# EAGLE board concept (EAGLE 6.3)
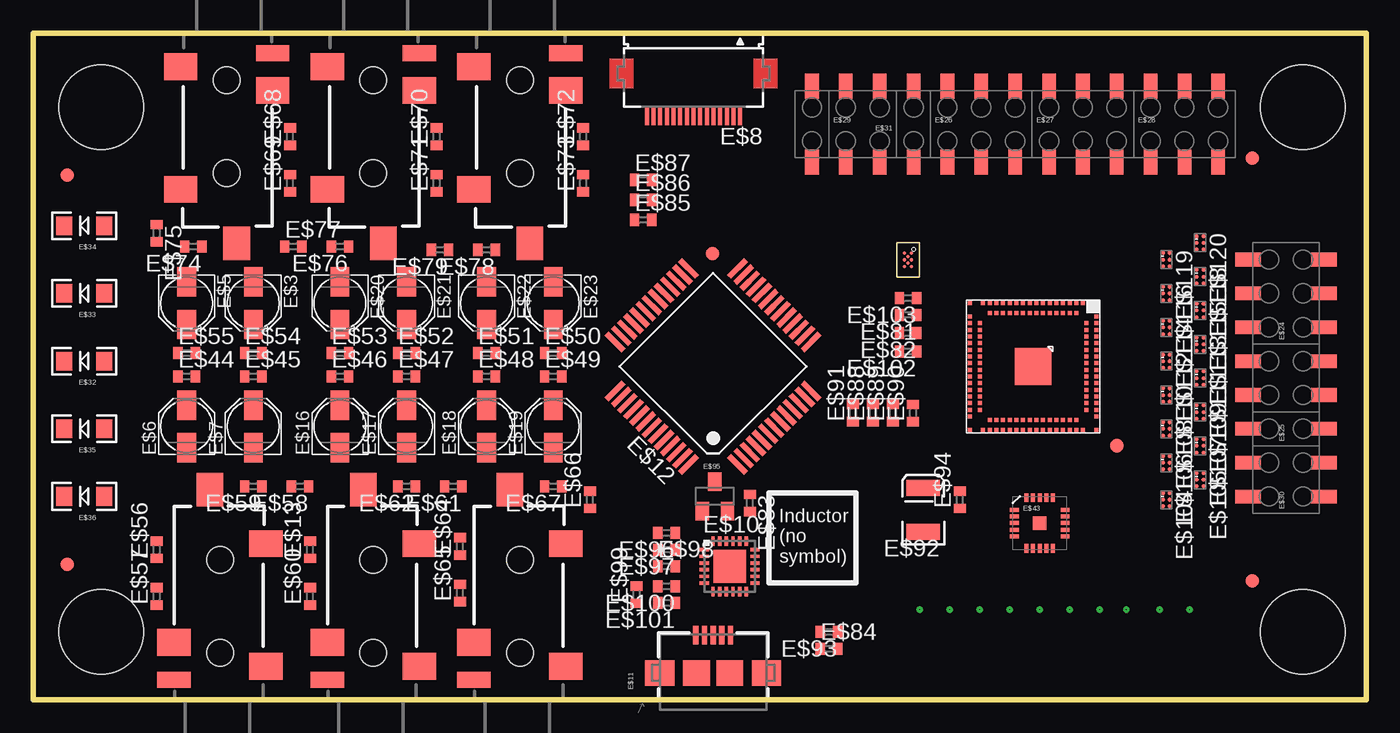
[diagram p0: board, top side]

Size 100 x 50 mm. Coordinates in mm from the lower left corner, seen from the top.
Outline: 100,0 100,50 0,50 0,0 100,0
Copper layers (1*16): Top 0.035mm / dielectric 1.5mm / Bottom 0.035mm
Design rules "default": minimum track width 10mil, minimum drill 24mil, track to track 8mil, track to pad 8mil, pad to pad 8mil, via to via 8mil, smd to smd 8mil, copper to edge 40mil, drill to drill 8mil, minimum pad ring 10mil, minimum via ring 8mil, stop-mask expansion 4mil, vias tented up to drill 0mil, thermal gap 10mil
Holes 6.35 mm at 95.25,44.45 95.25,5.08 5.08,44.45 5.08,5.08
tRestrict: 60 lines

## Footprints (pad centres in the part's own frame; a part is rotated, then mirrored left to right if it is on the bottom)
AUDIO-JACK-3.5MM-SMD = smd 2 x 2.5: RING 4.3,3.45; SLEEVE 2.5,-3.45; TIP 11.7,-3.45 | smd 1.2 x 2.5: RSH 1.5,3.45 | smd 2.5 x 2: TSH 15.75,0.75 | hole 2: 3.5,0; 10.5,0
PANASONIC_B = smd 2.2 x 1.4: + 1.6,0; - -1.6,0
FH12-15S-0.5SH = smd 0.3 x 1.3: 1 -3.5,3.25; 2 -3,3.25; 3 -2.5,3.25; 4 -2,3.25; 5 -1.5,3.25; 6 -1,3.25; 7 -0.5,3.25; 8 0,3.25; 9 0.5,3.25; 10 1,3.25; 11 1.5,3.25; 12 2,3.25; 13 2.5,3.25; 14 3,3.25; 15 3.5,3.25
QFN-124 = smd 0.3 x 0.3: A1 -4.75,4.75; A2 -4.75,3.75; A3 -4.75,3.25; A4 -4.75,2.75; A5 -4.75,2.25; A6 -4.75,1.75; A7 -4.75,1.25; A8 -4.75,0.75; A9 -4.75,0.25; A10 -4.75,-0.25; A11 -4.75,-0.75; A12 -4.75,-1.25; A13 -4.75,-1.75; A14 -4.75,-2.25; A15 -4.75,-2.75; A16 -4.75,-3.25; A17 -4.75,-3.75; A18 -4.75,-4.75; A19 -3.75,-4.75; A20 -3.25,-4.75; A21 -2.75,-4.75; A22 -2.25,-4.75; A23 -1.75,-4.75; A24 -1.25,-4.75; A25 -0.75,-4.75; A26 -0.25,-4.75; A27 0.25,-4.75; A28 0.75,-4.75; A29 1.25,-4.75; A30 1.75,-4.75; A31 2.25,-4.75; A32 2.75,-4.75; A33 3.25,-4.75; A34 3.75,-4.75; A35 4.75,-4.75; A36 4.75,-3.75; A37 4.75,-3.25; A38 4.75,-2.75; A39 4.75,-2.25; A40 4.75,-1.75; A41 4.75,-1.25; A42 4.75,-0.75; A43 4.75,-0.25; A44 4.75,0.25; A45 4.75,0.75; A46 4.75,1.25; A47 4.75,1.75; A48 4.75,2.25; A49 4.75,2.75; A50 4.75,3.25; A51 4.75,3.75; A52 4.75,4.75; A53 3.75,4.75; A54 3.25,4.75; A55 2.75,4.75; A56 2.25,4.75; A57 1.75,4.75; A58 1.25,4.75; A59 0.75,4.75; A60 0.25,4.75; A61 -0.25,4.75; A62 -0.75,4.75; A63 -1.25,4.75; A64 -1.75,4.75; A65 -2.25,4.75; A66 -2.75,4.75; A67 -3.25,4.75; A68 -3.75,4.75; B1 -4,3.25; B2 -4,2.75; B3 -4,2.25; B4 -4,1.75; B5 -4,1.25; B6 -4,0.75; B7 -4,0.25; B8 -4,-0.25; B9 -4,-0.75; B10 -4,-1.25; B11 -4,-1.75; B12 -4,-2.25; B13 -4,-2.75; B14 -4,-3.25; B15 -3.25,-4; B16 -2.75,-4; B17 -2.25,-4; B18 -1.75,-4; B19 -1.25,-4; B20 -0.75,-4; B21 -0.25,-4; B22 0.25,-4; B23 0.75,-4; B24 1.25,-4; B25 1.75,-4; B26 2.25,-4; B27 2.75,-4; B28 3.25,-4; B29 4,-3.25; B30 4,-2.75; B31 4,-2.25; B32 4,-1.75; B33 4,-1.25; B34 4,-0.75; B35 4,-0.25; B36 4,0.25; B37 4,0.75; B38 4,1.25; B39 4,1.75; B40 4,2.25; B41 4,2.75; B42 4,3.25; B43 3.25,4; B44 2.75,4; B45 2.25,4; B46 1.75,4; B47 1.25,4; B48 0.75,4; B49 0.25,4; B50 -0.25,4; B51 -0.75,4; B52 -1.25,4; B53 -1.75,4; B54 -2.25,4; B55 -2.75,4; B56 -3.25,4 | smd 2.75 x 2.75: PAD 0,0
QFN24 = smd 0.7 x 0.25: 1 -1.9,1.25; 2 -1.9,0.75; 3 -1.9,0.25; 4 -1.9,-0.25; 5 -1.9,-0.75; 6 -1.9,-1.25; 13 1.9,-1.25; 14 1.9,-0.75; 15 1.9,-0.25; 16 1.9,0.25; 17 1.9,0.75; 18 1.9,1.25 | smd 0.25 x 0.7: 7 -1.25,-1.9; 8 -0.75,-1.9; 9 -0.25,-1.9; 10 0.25,-1.9; 11 0.75,-1.9; 12 1.25,-1.9; 19 1.25,1.9; 20 0.75,1.9; 21 0.25,1.9; 22 -0.25,1.9; 23 -0.75,1.9; 24 -1.25,1.9 | smd 2.45 x 2.45: EXP 0,0
USB-AB-MICRO-SMD = smd 1.4 x 0.4: D+ 2.85,0; D- 2.85,0.65; GND 2.85,-1.3; ID 2.85,-0.65; VBUS 2.85,1.3 | smd 1.9 x 2: P$6 0,1.25; P$7 0,-1.25 | smd 1.9 x 2.2: P$8 0,4; P$9 0,-4
MQFP52 = smd 1.8 x 0.4: 1 -6.5,3.9; 2 -6.5,3.25; 3 -6.5,2.6; 4 -6.5,1.95; 5 -6.5,1.3; 6 -6.5,0.65; 7 -6.5,0; 8 -6.5,-0.65; 9 -6.5,-1.3; 10 -6.5,-1.95; 11 -6.5,-2.6; 12 -6.5,-3.25; 13 -6.5,-3.9; 27 6.5,-3.9; 28 6.5,-3.25; 29 6.5,-2.6; 30 6.5,-1.95; 31 6.5,-1.3; 32 6.5,-0.65; 33 6.5,0; 34 6.5,0.65; 35 6.5,1.3; 36 6.5,1.95; 37 6.5,2.6; 38 6.5,3.25; 39 6.5,3.9 | smd 0.4 x 1.8: 14 -3.9,-6.5; 15 -3.25,-6.5; 16 -2.6,-6.5; 17 -1.95,-6.5; 18 -1.3,-6.5; 19 -0.65,-6.5; 20 0,-6.5; 21 0.65,-6.5; 22 1.3,-6.5; 23 1.95,-6.5; 24 2.6,-6.5; 25 3.25,-6.5; 26 3.9,-6.5; 40 3.9,6.5; 41 3.25,6.5; 42 2.6,6.5; 43 1.95,6.5; 44 1.3,6.5; 45 0.65,6.5; 46 0,6.5; 47 -0.65,6.5; 48 -1.3,6.5; 49 -1.95,6.5; 50 -2.6,6.5; 51 -3.25,6.5; 52 -3.9,6.5
0402 = smd 0.7 x 0.9: 1 -0.65,0; 2 0.65,0
2X3_SMD = smd 1.02 x 1.9: 1 -2.54,-2.85; 2 -2.54,2.85; 3 0,-2.85; 4 0,2.85; 5 2.54,-2.85; 6 2.54,2.85
LED-1206 = smd 1.2 x 1.4: A -1.5,0; C 1.5,0
FIDUCIAL-1X2 = smd 1 x 1: 1 0,0
QFN20 = smd 1 x 1: 0 0,0 | smd 0.65 x 0.3: 1 -1.9,1; 2 -1.9,0.5; 3 -1.9,0; 4 -1.9,-0.5; 5 -1.9,-1; 11 1.9,-1; 12 1.9,-0.5; 13 1.9,0; 14 1.9,0.5; 15 1.9,1 | smd 0.3 x 0.65: 6 -1,-1.9; 7 -0.5,-1.9; 8 0,-1.9; 9 0.5,-1.9; 10 1,-1.9; 16 1,1.9; 17 0.5,1.9; 18 0,1.9; 19 -0.5,1.9; 20 -1,1.9
M24M01 = smd 0.27 x 0.27: DU -0.5,-0.27; E1 -0.25,0; E2 0,0.27; SCL 0.245,0; SDA 0.5,0.27; VCC 0.5,-0.27; VSS -0.5,0.27; ~WC 0,-0.27
EIA3528 = smd 1.2 x 2.5: A 1.65,0; C -1.65,0
SOT23 = smd 1 x 1.4: 1 -0.95,-1.1; 2 0.95,-1.1; 3 0,1.1
YZP_R-XBGA-N6 = smd 0.3 x 0.3: A1 -0.5,-0.25; A2 -0.5,0.25; B1 0,-0.25; B2 0,0.25; C1 0.5,-0.25; C2 0.5,0.25

## Placement (x,y rotation side)
E$1  [AUDIO-JACK-3.5MM-SMD]  14,0 90 top
E$2  [AUDIO-JACK-3.5MM-SMD]  14.5,50 270 top
E$3  [PANASONIC_B]  16.5,29.75 270 top
E$4  [AUDIO-JACK-3.5MM-SMD]  25.5,0 90 top
E$5  [PANASONIC_B]  11.5,29.75 270 top
E$6  [PANASONIC_B]  11.5,20.5 90 top
E$7  [PANASONIC_B]  16.5,20.5 90 top
E$8  [FH12-15S-0.5SH]  49.53,46.99 180 top
E$9  [QFN-124]  75,25 270 top
E$10  [QFN24]  52.24,10 0 top
E$11  [USB-AB-MICRO-SMD]  51,2 90 top
E$12  [MQFP52]  51,25 135 top
E$13  [0402]  20.75,11.25 90 top
E$14  [AUDIO-JACK-3.5MM-SMD]  25.5,50 270 top
E$15  [AUDIO-JACK-3.5MM-SMD]  36.5,50 270 top
E$16  [PANASONIC_B]  23,20.5 90 top
E$17  [PANASONIC_B]  28,20.5 90 top
E$18  [PANASONIC_B]  34,20.5 90 top
E$19  [PANASONIC_B]  39,20.5 90 top
E$20  [PANASONIC_B]  23,29.75 270 top
E$21  [PANASONIC_B]  28,29.75 270 top
E$22  [PANASONIC_B]  34,29.75 270 top
E$23  [PANASONIC_B]  39,29.75 270 top
E$24  [2X3_SMD]  93.98,30.48 90 top
E$25  [2X3_SMD]  93.98,22.86 90 top
E$26  [2X3_SMD]  71.12,43.18 0 top
E$27  [2X3_SMD]  78.74,43.18 0 top
E$28  [2X3_SMD]  86.36,43.18 0 top
E$29  [2X3_SMD]  63.5,43.18 0 top
E$30  [2X3_SMD]  93.98,17.78 90 top
E$31  [2X3_SMD]  60.96,43.18 180 top
E$32  [LED-1206]  3.81,25.4 180 top
E$33  [LED-1206]  3.81,30.48 180 top
E$34  [LED-1206]  3.81,35.56 180 top
E$35  [LED-1206]  3.81,20.32 180 top
E$36  [LED-1206]  3.81,15.24 180 top
E$37  [FIDUCIAL-1X2]  2.54,10.16 90 top
E$38  [FIDUCIAL-1X2]  2.54,39.37 90 top
E$39  [FIDUCIAL-1X2]  91.44,40.64 90 top
E$40  [FIDUCIAL-1X2]  91.44,8.89 90 top
E$41  [FIDUCIAL-1X2]  81.28,19.05 90 top
E$42  [FIDUCIAL-1X2]  50.97,33.48 90 top
E$43  [QFN20]  75.5,13.25 0 top
E$44  [0402]  11.5,24.25 0 top
E$45  [0402]  16.5,24.25 0 top
E$46  [0402]  23,24.25 0 top
E$47  [0402]  28,24.25 0 top
E$48  [0402]  34,24.25 0 top
E$49  [0402]  39,24.25 0 top
E$50  [0402]  39,26 0 top
E$51  [0402]  34,26 0 top
E$52  [0402]  28,26 0 top
E$53  [0402]  23,26 0 top
E$54  [0402]  16.5,26 0 top
E$55  [0402]  11.5,26 0 top
E$56  [0402]  9.25,11.25 90 top
E$57  [0402]  9.25,7.75 90 top
E$58  [0402]  20,16 180 top
E$59  [0402]  16.5,16 180 top
E$60  [0402]  20.75,7.75 90 top
E$61  [0402]  31.5,16 180 top
E$62  [0402]  28,16 180 top
E$63  [AUDIO-JACK-3.5MM-SMD]  36.5,0 90 top
E$64  [0402]  32,11.5 90 top
E$65  [0402]  32,8 90 top
E$66  [0402]  41.75,15 90 top
E$67  [0402]  39,16 180 top
E$68  [0402]  19.25,42.25 90 top
E$69  [0402]  19.25,38.75 90 top
E$70  [0402]  30.25,42.25 90 top
E$71  [0402]  30.25,38.75 90 top
E$72  [0402]  41.25,42.25 90 top
E$73  [0402]  41.25,38.75 90 top
E$74  [0402]  12,34 180 top
E$75  [0402]  9.25,35 270 top
E$76  [0402]  23,34 180 top
E$77  [0402]  19.5,34 0 top
E$78  [0402]  34,33.75 180 top
E$79  [0402]  30.5,33.75 180 top
E$80  [M24M01]  65.62,33 90 top
E$81  [0402]  65.62,28.88 180 top
E$82  [0402]  65.62,27.5 180 top
E$83  [0402]  53.75,14.75 270 top
E$84  [0402]  59.69,3.81 0 top
E$85  [0402]  45.75,36 0 top
E$86  [0402]  45.75,37.5 0 top
E$87  [0402]  45.75,39 0 top
E$88  [0402]  63,21.5 90 top
E$89  [0402]  64.5,21.5 90 top
E$90  [0402]  66,21.5 90 top
E$91  [0402]  61.5,21.5 90 top
E$92  [EIA3528]  66.75,14.25 90 top
E$93  [0402]  59.69,5.08 180 top
E$94  [0402]  69.5,15 90 top
E$95  [SOT23]  51.12,15.25 0 top
E$96  [0402]  47.5,12.5 180 top
E$97  [0402]  47.5,11.25 180 top
E$98  [0402]  47.5,10 0 top
E$99  [0402]  45.25,7.88 90 top
E$100  [0402]  47.5,8.5 180 top
E$101  [0402]  47.5,7.25 180 top
E$102  [0402]  65.62,26.12 180 top
E$103  [0402]  65.62,30.12 180 top
E$104  [YZP_R-XBGA-N6]  85,15 270 top
E$105  [YZP_R-XBGA-N6]  87.54,16.5 270 top
E$106  [YZP_R-XBGA-N6]  85,17.77 270 top
E$107  [YZP_R-XBGA-N6]  87.54,19.04 270 top
E$108  [YZP_R-XBGA-N6]  85,20.31 270 top
E$109  [YZP_R-XBGA-N6]  87.54,21.58 270 top
E$110  [YZP_R-XBGA-N6]  85,22.85 270 top
E$111  [YZP_R-XBGA-N6]  87.54,24.12 270 top
E$112  [YZP_R-XBGA-N6]  85,25.39 270 top
E$113  [YZP_R-XBGA-N6]  87.54,26.66 270 top
E$114  [YZP_R-XBGA-N6]  85,27.93 270 top
E$115  [YZP_R-XBGA-N6]  87.54,29.2 270 top
E$116  [YZP_R-XBGA-N6]  85,30.47 270 top
E$118  [YZP_R-XBGA-N6]  87.54,31.74 270 top
E$119  [YZP_R-XBGA-N6]  85,33.01 270 top
E$120  [YZP_R-XBGA-N6]  87.54,34.28 270 top

## Library data of the parts
E$1 E$2 E$4 E$11 E$14 E$15 E$24-E$31 E$63 = SparkFun-Connectors
E$3 E$5-E$7 E$16-E$23 = adafruit
E$8 = con-hirose
E$9 E$10 E$80 = Strutz Electronic Industries
E$12 = analog-devices
E$13 E$44-E$62 E$64-E$79 E$81-E$91 E$93 E$94 E$96-E$103 = inductors
E$32-E$36 = SparkFun-LED
E$37-E$42 = SparkFun-Aesthetics
E$43 = SparkFun-DigitalIC
E$92 = SparkFun-Passives
E$95 = 1x05smd
E$104-E$116 E$118-E$120 = 74xx-little-de

## Tracks (layer width: path | path; a pad name or v marks a point on that pad's centre or on a via)
S$1  (via drill 0.05 pad 0.1)
  other vias: 66.5,6.75
S$2  (via drill 0.05 pad 0.1)
  other vias: 68.75,6.75
S$3  (via drill 0.05 pad 0.1)
  other vias: 71,6.75
S$4  (via drill 0.05 pad 0.1)
  other vias: 73.25,6.75
S$5  (via drill 0.05 pad 0.1)
  other vias: 75.5,6.75
S$6  (via drill 0.05 pad 0.1)
  other vias: 77.75,6.75
S$7  (via drill 0.05 pad 0.1)
  other vias: 80,6.75
S$8  (via drill 0.05 pad 0.1)
  other vias: 82,6.75
S$9  (via drill 0.05 pad 0.1)
  other vias: 84.5,6.75
S$10  (via drill 0.05 pad 0.1)
  other vias: 86.75,6.75

## Text on the board
tPlace: Inductor / (no / symbol)